# Altium PCB PCB1.PcbDoc
Units mil, origin at the board's own origin, x right, y up, seen from the top; angles counter-clockwise.
Board outline 1157.48 x 1771.65 mil, 2 copper layers (Top Layer, Bottom Layer); 46 components, 32 nets, 192 pads, 99 vias.
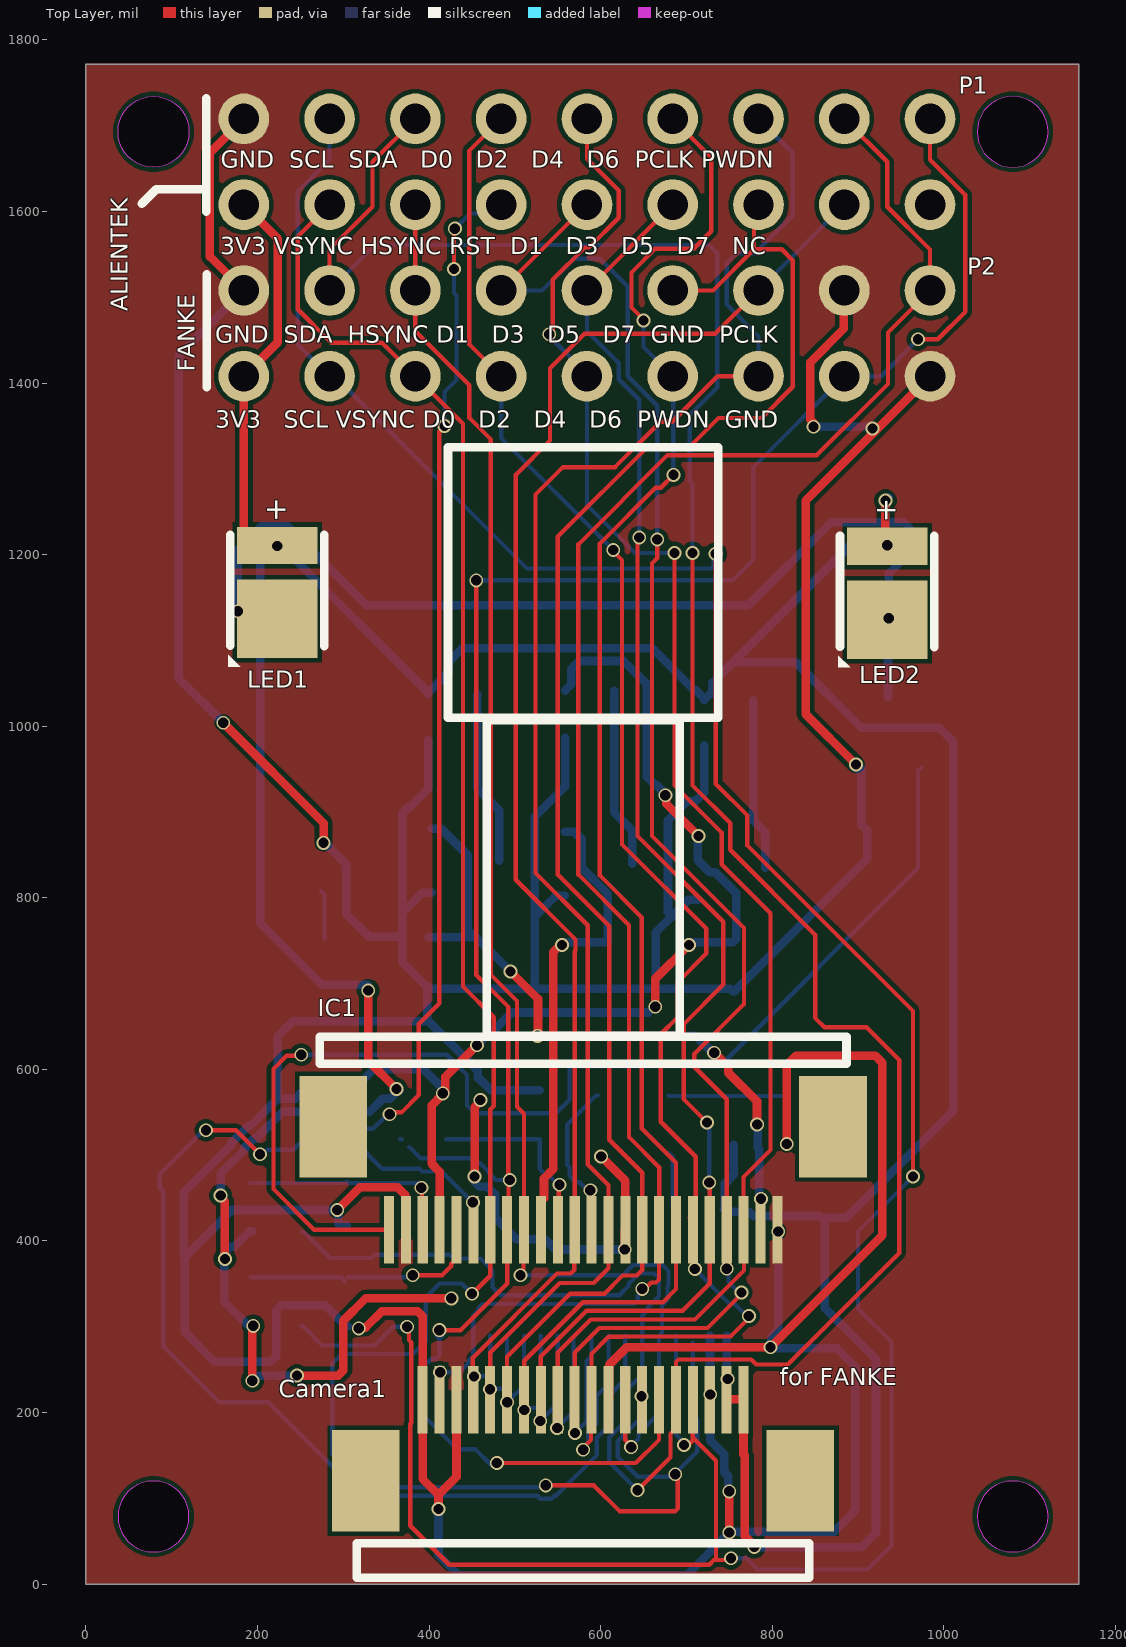
[diagram p0: Top Layer view]
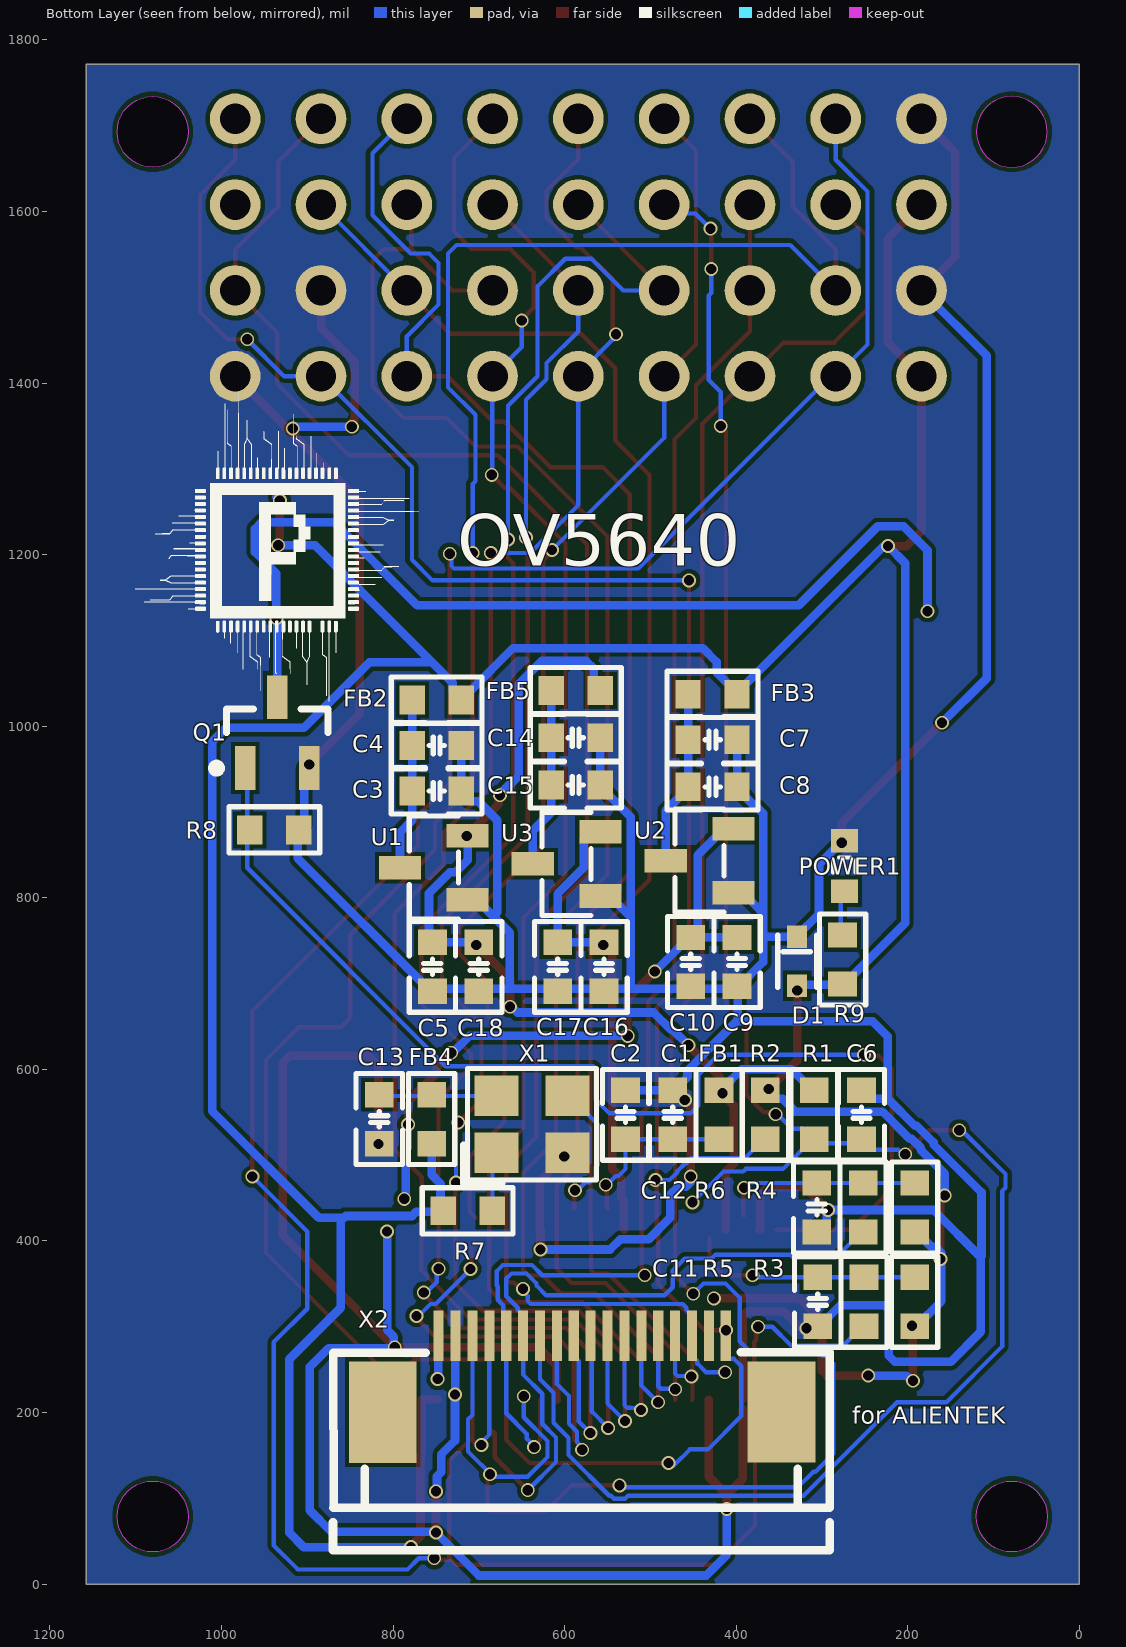
[diagram p1: Bottom Layer view, seen from below]
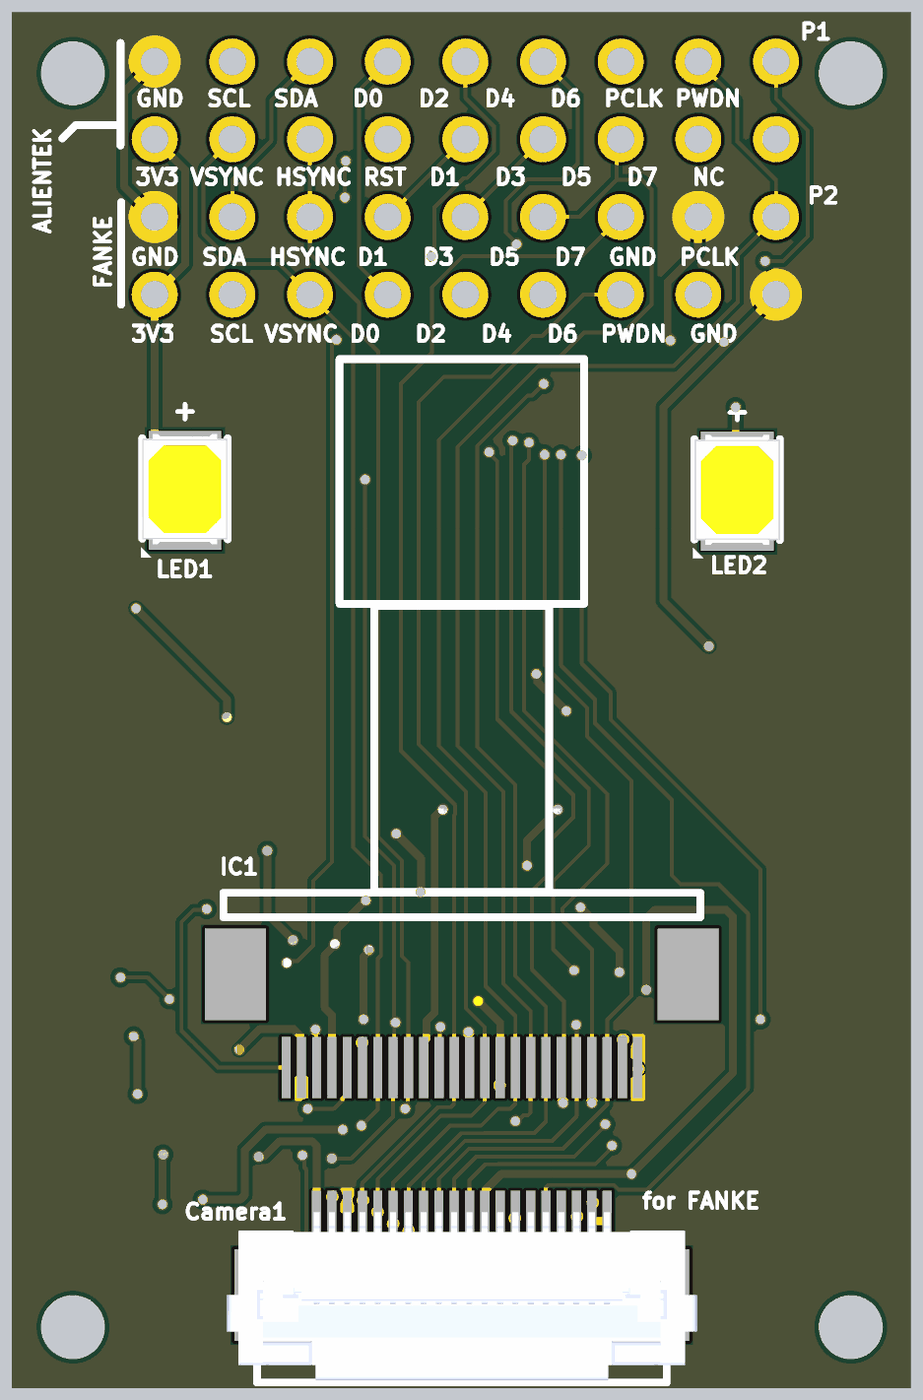
[diagram p2: 3D render of the assembled board from above, using the file's embedded part models]
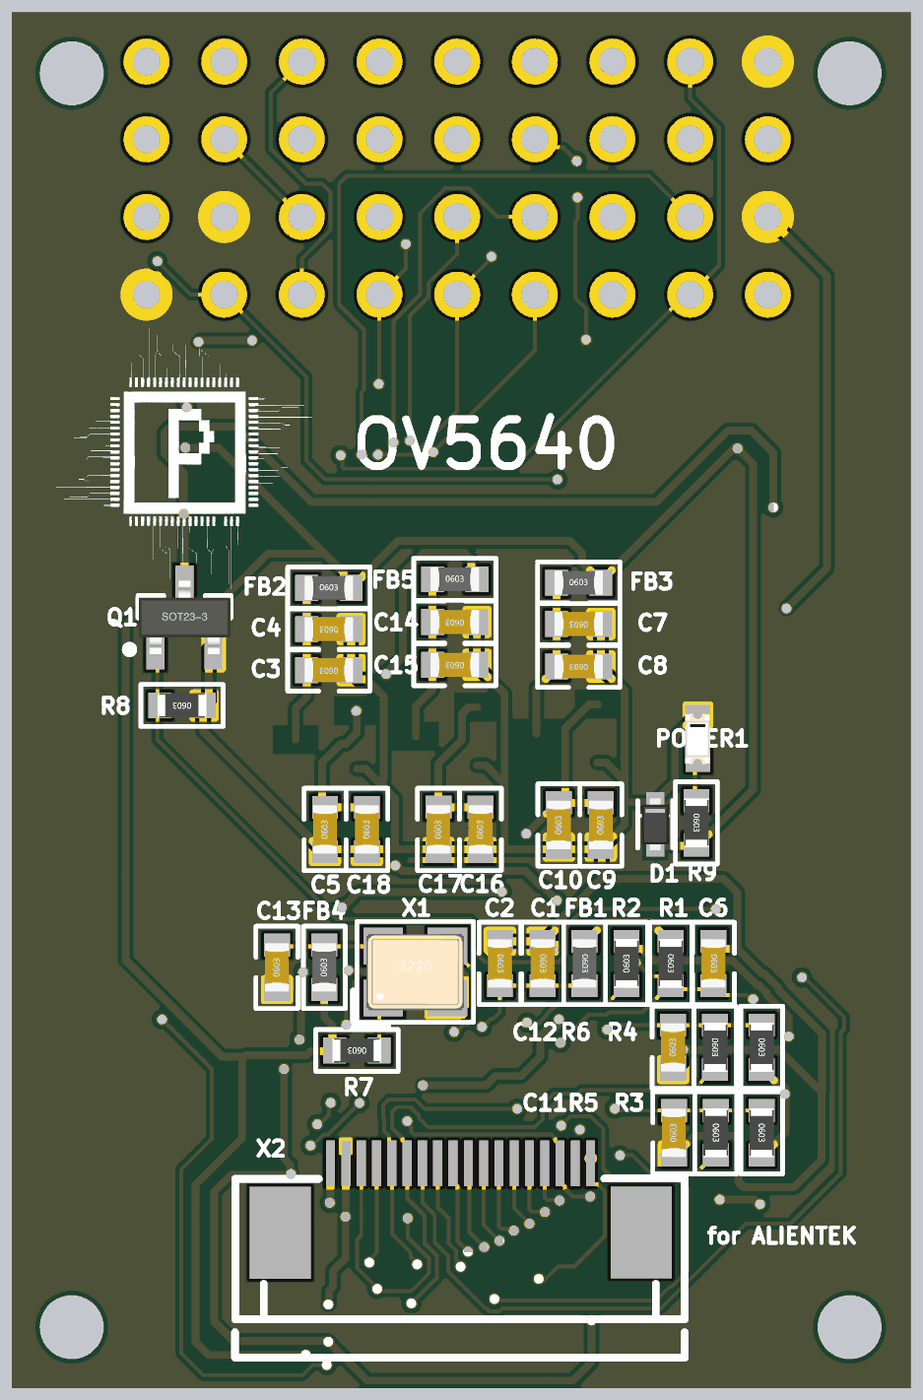
[diagram p3: 3D render of the assembled board from below, using the file's embedded part models]

## Layer stack, top to bottom
Top Solder: solder mask 0.4, Solder Resist, Dk 3.5
Top Layer: signal copper 1.4
Dielectric 1: dielectric 12.6, FR-4, Dk 4.8
Bottom Layer: signal copper 1.4
Bottom Solder: solder mask 0.4, Solder Resist, Dk 3.5

## Board outline
0,0 0,1771.65 1157.48,1771.65 1157.48,0
cut-out: 1038.94,1692.91 ccw(c1080.28,1692.91) 1080.28,1651.57 ccw(c1080.28,1692.91) 1121.61,1692.91 ccw(c1080.28,1692.91) 1080.28,1734.25 ccw(c1080.28,1692.91)
cut-out: 1038.94,78.74 ccw(c1080.28,78.74) 1080.28,37.4 ccw(c1080.28,78.74) 1121.61,78.74 ccw(c1080.28,78.74) 1080.28,120.08 ccw(c1080.28,78.74)
cut-out: 37.4,78.74 ccw(c78.74,78.74) 78.74,37.4 ccw(c78.74,78.74) 120.08,78.74 ccw(c78.74,78.74) 78.74,120.08 ccw(c78.74,78.74)
cut-out: 78.74,1651.57 cw(c78.74,1692.91) 37.4,1692.91 cw(c78.74,1692.91) 78.74,1734.25 cw(c78.74,1692.91) 120.08,1692.91 cw(c78.74,1692.91)

## Design rules (kind name [scope] priority, off if disabled: settings)
Clearance [All] p1: gap=5 ignorepadtopadclearanceinfootprint=FALSE
PlaneClearance [All] p1: clearance=7
PlaneConnect [All] p1: planeconnectstyle=Direct reliefexpansion=20 reliefentries=4 reliefconductorwidth=10 reliefairgap=10
PolygonConnect [All] p1: connectstyle=Direct reliefconductorwidth=10 reliefentries=4 polygonreliefangle="90 Angle" airgapwidth=10
RoutingVias [All] p1: holewidth=12 width=16.14 viastyle="Through Hole" minholewidth=12 minwidth=16.14 maxholewidth=12 maxwidth=16.14
SolderMaskExpansion [All] p1: expansion=4 istentingtop=FALSE
Width power [InNetClass('power')] p1: maxlimit=12 minlimit=10 preferedwidth=10 minimp=50.000000 maximp=50.000000 favimp=50.000000
Width [All] p2: maxlimit=12 minlimit=5 preferedwidth=5 minimp=50.000000 maximp=50.000000 favimp=50.000000
28 further rules are at their usual default settings.

## Classes and differential pairs
net class cam_data: DCMI_D0 DCMI_D1 DCMI_D2 DCMI_D3 DCMI_D4 DCMI_D5 DCMI_D6 DCMI_D7 DCMI_HSYNC DCMI_PIXCLK DCMI_VSYNC
net class power: 1.5V 2.8V 3.3V AF-2.8V GND

## Components (designator, comment, footprint, x,y, rotation, side; value= is the part's Value field where it differs from the comment)
C1 "0.1UF" C0603_L 474,547 r270 bottom
C2 "10UF" C0603_L 529,547 r270 bottom
C3 "10UF" C0603_L 749.15,924.49 r0 bottom
C4 "0.1UF" C0603_L 749.15,977.49 r0 bottom
C5 "10UF" C0603_L 754.15,719.49 r90 bottom
C6 "1UF" C0603_L 254,547 r270 bottom
C7 "10UF" C0603_L 427.54,984.14 r0 bottom
C8 "0.1UF" C0603_L 427.54,929.32 r0 bottom
C9 "10UF" C0603_L 399.04,725.24 r90 bottom
C10 "0.1UF" C0603_L 453.04,725.24 r90 bottom
C11 "100pF" C0603_L 305,329 r90 bottom
C12 "100pF" C0603_L 306,439 r90 bottom
C13 "1UF" C0603_L 816.05,541.95 r90 bottom
C14 "10UF" C0603_L 587.06,986.55 r0 bottom
C15 "0.1UF" C0603_L 587.06,931.55 r0 bottom
C16 "10UF" C0603_L 554.06,719.55 r90 bottom
C17 "0.1UF" C0603_L 608.06,719.55 r90 bottom
C18 "0.1UF" C0603_L 700.15,719.49 r90 bottom
Camera1 "FPC 20P-0.5mm翻盖下接" FPC20P-0.5MM 579.5,167.6 r0 top locked
D1 "ESD5Z3V3/丝印ZE" SOD523 329,726 r270 bottom
FB1 "SCBG160808U501T" FB0603 420,547 r270 bottom
FB2 "SCBG160808U501T" FB0603 749.15,1030.49 r180 bottom
FB3 "SCBG160808U501T" FB0603 427.54,1037.14 r180 bottom
FB4 "SCBG160808U501T" FB0603 755.05,541.95 r90 bottom
FB5 "SCBG160808U501T" FB0603 587.06,1041.55 r180 bottom
IC1 "OV5640" OV2640 579.5,475.04 r0 top locked
LED1 "2835" "LED 2835-2P" 223,1168 r90 top
LED2 "2835" "LED 2835-2P" 934,1167 r90 top
P1 "Header 9X2" HDR2X9#1 184,1608 r0 top
P2 "Header 9X2" HDR2X9#2 184,1508 r0 top
POWER1 "LED" D0603 274,837 r90 bottom
Q1 "SI2302" SOT23-3N 935,992.44 r180 bottom
R1 "10k" R0603_L 309,547 r270 bottom
R2 "10k" R0603_L 366,547 r90 bottom
R3 "2.7k" R0603_L 192,329 r270 bottom
R4 "2.7k" R0603_L 192,439 r270 bottom
R5 "39" R0603_L 251,329 r270 bottom
R6 "39" R0603_L 252,439 r270 bottom
R7 "10k" R0603_L 713,435 r0 bottom
R8 "10K" R0603_L 938.4,879.1 r0 bottom
R9 "10k" R0603_L 276,728 r270 bottom
U1 "LN6206P282MR-G" SOT-23-3_L2.9-W1.3-P1.90-LS2.4-BR 17705.13,17432.09 r180 bottom
U2 "LN6206P282MR-G" SOT-23-3_L2.9-W1.3-P1.90-LS2.4-BR 17395.25,17440.14 r180 bottom
U3 "LN6206P152MR-G" SOT-23-3_L2.9-W1.3-P1.90-LS2.4-BR 17550.32,17436.54 r180 bottom
X1 "24M" OSC-3225-4P 638,536 r180 bottom
X2 "AFC07-S18ECA-00" FPC-SMD_AFC07-S18ECA-00 579.5,244.94 r180 bottom locked

## Footprints (in the part's own frame and the unit in brackets; to place one, negate y for a bottom-side part, rotate by r counter-clockwise, add the part's x,y. Pads: shape width x height; smd on the part's side, far side on the other; paste and mask are expansions set on the pad)
C0603_L [mm]
  rect 0.75x0.85 smd: 1(-0.725,0) 2(0.725,0)
  silkscreen extent -1.35,-0.69 1.35,0.69, body extent -0.8,-0.4 0.8,0.4, height 0.8
D0603 [mm]
  rect 0.7x0.8 smd: 1(-0.75,0) 2(0.75,0)
  silkscreen extent -0.19,-0.33 0.25,0.33, body extent -0.85,-0.39 0.8,0.41, height 0.52
FB0603 [mm]
  rect 0.75x0.85 smd: 1(-0.725,0) 2(0.725,0)
  silkscreen extent -1.35,-0.69 1.35,0.69, body extent -0.8,-0.4 0.8,0.4, height 0.8
FPC20P-0.5MM [mm]
  rect 2x3 smd: 0(-6.436,-1.202) 0(6.436,-1.202)
  rect 0.3x2 smd: 1(4.75,1.202) 2(4.25,1.202) 3(3.75,1.202) 4(3.25,1.202) 5(2.75,1.202) 6(2.25,1.202) 7(1.75,1.202) 8(1.25,1.202) 9(0.75,1.202) 10(0.25,1.202) 11(-0.25,1.202) 12(-0.75,1.202) 13(-1.25,1.202) 14(-1.75,1.202) 15(-2.25,1.202) 16(-2.75,1.202) 17(-3.25,1.202) 18(-3.75,1.202) 19(-4.25,1.202) 20(-4.75,1.202)
  silkscreen extent -6.7,-4.07 6.7,-3.05, body extent -7.7,-4 7.7,1.5, height 2.1
FPC-SMD_AFC07-S18ECA-00 [mm]
  rect 0.3x1.5 smd: 1(-4.26,1.133) 2(-3.75,1.133) 3(-3.25,1.133) 4(-2.75,1.133) 5(-2.25,1.133) 6(-1.75,1.133) 7(-1.25,1.133) 8(-0.75,1.133) 9(-0.25,1.133) 10(0.25,1.133) 11(0.75,1.133) 12(1.25,1.133) 13(1.75,1.133) 14(2.25,1.133) 15(2.75,1.133) 16(3.25,1.133) 17(3.75,1.133) 18(4.25,1.133)
  rect 2x3 smd: 19(5.901,-1.126) 20(-5.901,-1.133)
  silkscreen extent -7.38,-5.22 7.33,0.64
HDR2X9#1 [mm]
  round 1.5 hole 0.9: 1(0,0) 2(0,2.54) 3(2.54,0) 4(2.54,2.54) 5(5.08,0) 6(5.08,2.54) 7(7.62,0) 8(7.62,2.54) 9(10.16,0) 10(10.16,2.54) 11(12.7,0) 12(12.7,2.54) 13(15.24,0) 14(15.24,2.54) 15(17.78,0) 16(17.78,2.54) 17(20.32,0) 18(20.32,2.54)
HDR2X9#2 [mm]
  round 1.5 hole 0.9: 1(0,0) 2(0,-2.54) 3(2.54,0) 4(2.54,-2.54) 5(5.08,0) 6(5.08,-2.54) 7(7.62,0) 8(7.62,-2.54) 9(10.16,0) 10(10.16,-2.54) 11(12.7,0) 12(12.7,-2.54) 13(15.24,0) 14(15.24,-2.54) 15(17.78,0) 16(17.78,-2.54) 17(20.32,0) 18(20.32,-2.54)
"LED 2835-2P" [mm]
  rect 1.1x2.38 smd mask+0.051: 1(1.088,0)
  rect 2.33x2.38 smd mask+0.051: 2(-1.088,0)
  silkscreen extent -2.5,-1.4 1.4,1.45, body extent -2.06,-1.4 1.54,1.4, height 0.71
OSC-3225-4P [mm]
  rect 1.3x1.2 smd: 1(-1.05,-0.85) 2(1.05,-0.85) 3(1.05,0.85) 4(-1.05,0.85)
  silkscreen extent -2.03,-1.75 1.91,1.65, body extent -1.6,-1.25 1.6,1.25, height 0.7
OV2640 [mm]
  rect 2x3 smd: 0(-7.4,1.476) 0(7.4,1.476)
  rect 0.3x2 smd: 1(-5.746,-1.574) 2(-5.248,-1.576) 3(-4.748,-1.576) 4(-4.248,-1.576) 5(-3.748,-1.576) 6(-3.248,-1.576) 7(-2.748,-1.576) 8(-2.248,-1.576) 9(-1.748,-1.576) 10(-1.248,-1.576) 11(-0.748,-1.576) 12(-0.248,-1.576) 13(0.252,-1.576) 14(0.752,-1.576) 15(1.252,-1.576) 16(1.752,-1.576) 17(2.252,-1.576) 18(2.752,-1.576) 19(3.252,-1.576) 20(3.752,-1.576) 21(4.252,-1.576) 22(4.752,-1.576) 23(5.252,-1.576) 24(5.752,-1.576)
  silkscreen extent -7.8,3.34 7.8,4.13
R0603_L [mm]
  rect 0.75x0.85 smd: 1(-0.725,0) 2(0.725,0)
  silkscreen extent -1.35,-0.69 1.35,0.69, body extent -0.8,-0.4 0.8,0.4, height 0.4
SOD523 [mil]
  rect 26x23.62 smd paste+0 mask+0: 1(28.5,0) 2(-28.5,0)
  silkscreen extent -31,-23 31,23, body extent -34,-17 34,17, height 28
SOT23-3N [mm]
  rect 0.6x1.3 smd: 1(-0.95,-1.05) 2(0.95,-1.05) 3(0,1.05)
  silkscreen extent -1.93,-1.17 1.5,0.7, body extent -1.5,-1.2 1.5,1.2, height 1.05
SOT-23-3_L2.9-W1.3-P1.90-LS2.4-BR [mm]
  rect 1.25x0.7 smd paste+0 mask+0.051: 1(431.596,-422.514) 2(431.596,-420.614) 3(429.597,-421.564)
  silkscreen extent 429.87,-423.09 431.32,-420.04

## Part data
C1 C2 C3 C4 C5 C6 C7 C8 C9 C10 C11 C12 C13 C14 C15 C16 C17 C18: library part C, "贴片电容/MLCC电容"
Camera1: library part FK_Camera
D1: library part TVS
FB1 FB2 FB3 FB4 FB5: library part FB, "贴片磁珠"
LED1 LED2: library part LED-2835, "0.2W 功率LED"
P1 P2: "Header, 9-Pin, Dual row"
Q1: "N沟道 20V/3A"
R1 R2 R3 R4 R5 R6 R7 R8 R9: library part R, "贴片电阻"
U3: library part LN6206P282MR-G
X1: library part XTAL-ACT-4P, "4脚有源晶振(振荡器)"

## Via types
v1: diameter 16.14, hole 12, Top Layer to Bottom Layer, tented both sides, 97 vias
v2: diameter 16.14, hole 12.01, Top Layer to Bottom Layer, tented both sides, 2 vias

## Nets (pads, with @x,y where several pads share a name; then routed paths per layer and width w, separated by ;. In a path a pad name is that pad's centre, name@x,y a point inside that pad or via, vN(x,y) a via of type N, cw(c..) or ccw(c..) an arc to the next point about the centre after c; other vN are vias at no path point)
1.5V: C16.2 C17.2 IC1.10 U3.2 | length 552.2
  Top Layer w10: IC1.10 531.28,413.91 531.28,447.37 533.94,450.03 533.94,472.86 544.5,483.43 544.5,736.5 553,745 v1(555,745)
  Bottom Layer w10: C16.2@555,748.09 C17.2 608.06,804.94 577.94,835.06 577.94,868.17 569.16,876.95 U3.2
2.8V: C5.2 C18.2 FB1.1 FB5.2 IC1.4 R1.1 U1.2 | length 1223.8
  Top Layer w10: IC1.4 412.26,480.74 403,490 403,558 416,571 v1(416,572) ; v1@419,572 419,591.25 v1(455.75,628) ; v1(663.57,673) 663.57,705.57 v1(703,745) ; v1(675.42,919.56) 676.59,918.39 676.59,909.41 v1(714,872)
  Bottom Layer w10: R1.1 310.97,575.54 335.73,600.31 393.27,600.31 415.57,578 FB1.1@417,578 ; v1(455.75,628) 474.47,646.72 476.72,646.72 496.24,666.24 655.15,666.24 661.91,673 v1(663.57,673) ; FB5.2 565.89,1048.91 565.89,1066.89 575,1076 626.79,1076 653.67,1049.12 653.67,941.33 663.01,931.99 664.92,931.99 664.92,931.73 675.42,921.22 v1(675.42,919.56) ; v1(703,745) 703,745.18 C18.2 C5.2 758.06,751.95 758.06,805.3 733.7,829.66 727.2,829.66 713.15,843.71 U1.2 713.51,872.49 v1(714,872)
3.3V: Camera1.1 Camera1.2 D1.1 FB2.2 FB3.2 FB4.1 LED1.1 LED2.1 P1.1 P2.2 R2.2 R3.2 R4.2 R7.2 R9.2 X2.1 | length 4927.7
  Top Layer w10: v1(162,379) 162,446.34 ; P1.1 223.53,1568.47 223.53,1447.53 P2.2 184,1227.47 201.47,1210 v1(223,1210) ; v1(194,237) 194,300 v1(195,301) ; v1(246,243) 294.14,243 300,248.86 300,307 326,333 v1(426,333) ; v1(329,692) 329,610 v1(362,577) ; Camera1.2@747.71,215.29 766.15,215.29 Camera1.1 766.49,151.51 768,150 768,55.77 779,44.77 v1(779,43.11) ; LED2.1@932,1220 v1(932,1263) ; LED2.1 v1(934,1211)
  Bottom Layer w10: v1(157.01,452.99) 157.01,478.19 184.93,506.11 184.93,508.49 195.51,519.07 197.89,519.07 229.6,550.78 330.98,550.78 345.98,565.78 354.27,565.78 R2.2@364.03,575.54 ; R3.2 190.03,300.46 161,329.49 161,386 168.07,393.07 172.65,393.07 190.57,411 R4.2@194,411 ; v1(194,237) 195.66,237 201.66,243 v1(246,243) ; D1.1 328.02,698.48 275.48,698.48 275.24,698.24 203,770.49 203,1190 v1(223,1210) 228.11,1210 399,1039.11 FB3.2 ; v1(362,577) 363.46,575.54 R2.2@364.03,575.54 ; R2.2 R2.2@364.03,575.54 ; FB3.2@401,1041.11 422.91,1063.02 422.91,1074.91 439,1091 660.09,1091 708.87,1042.22 710.84,1042.22 FB2.2@720.6,1032.46 ; v1@425.74,333 v1(426,333) ; FB2.2 730.37,1040.25 730.37,1050.37 754.5,1074.5 ; X2.1 747.22,239.78 v1(748,239) ; FB4.1@755,512 755,477.04 744.7,466.73 744.7,438.15 743.77,437.23 747,434 772.88,434 777.88,429 799.44,429 799.51,429.07 855.07,429.07 857.14,427 886.68,427 1011,551.32 1011,982 995,998 904,998 827.5,1074.5 754.5,1074.5 ; v1(779,43.11) 779.11,43 904,43 921,60 921,262 861,322 861,423.14 ; v1(932,1263) v1@936,1267 ; v1(934,1211) 891,1211 754.5,1074.5
AF-2.8V: C9.2 C10.2 IC1.23 U2.2 | length 761.6
  Top Layer w10: v1(495,714) 527,682 527,639.57 v1(526.43,639) ; v1(732.3,619.28) 748.86,602.71 748.86,596.14 782.29,562.71 782.29,538.59 782.43,538.45 v1(782.43,535.75)
  Bottom Layer w10: C9.2 C10.2 ; U2.2 414.09,880.54 445,849.64 445,761.83 C10.2 ; v1(495,714) 494.8,714 455.01,753.79 C10.2 ; v1(526.43,639) 710.91,639 730.63,619.28 v1(732.3,619.28) ; v1(782.43,535.75) 783.14,535.04 783.14,508.43 785,506.57 785,450.98 v1(786.98,449)
CAM_PWDN: Camera1.6 IC1.8 P1.18 P2.16 R2.1 X2.18 | length 2545.6
  Top Layer w5: v1(412,296) 437,296 491,350 IC1.8 492.5,414.5 492.5,469.5 v2(494,471) 492.43,472.57 492.43,672.57 455,710 v1(455,1170) ; v1(479,141) 641,141 668.07,168.07 Camera1.6 ; v1(970,1451) 993,1451 1025,1483 1025,1619.36 984,1660.36 P1.18
  Bottom Layer w5: R2.1 R2.1@367.97,518.46 ; R2.1@377,509.43 390.23,496.19 452.48,496.19 458.11,490.57 459.45,490.57 468.57,481.45 468.57,480.11 477.68,471 v2@491,471 ; v1(412,296) 412,265.75 408.77,262.52 402.56,262.52 394.05,254 394.05,195.95 433,157 454,157 472.43,138.57 472.73,138.87 476.87,138.87 v1(479,141) ; v1(455,1170) 754,1170 778,1194 778,1302 P2.16 927,1408 v1(970,1451)
  Bottom Layer w10: X2.18 X2.18@413.08,290.45
CAM_RESET: C6.2 IC1.6 P1.7 R1.2 X2.7 | length 2590.8
  Top Layer w5: v1(140,529) 175,529 v1(203,501) ; v1(354,547.71) 356.13,549.84 367.84,549.84 388,570 388,653 412,677 412,1344 v1(418,1350) ; v1(429,1533) 429,1579 v1(430,1580) ; v1(450.93,444.93) v1(451,444.93)
  Bottom Layer w5: v1(140,529) 137,529 86,478 86,462 90,458 90,277 155,212 212.6,212 321.6,103 525.98,103 529.55,99.43 542.45,99.43 546.02,103 548.02,103 595.57,150.55 595.57,170.57 613,188 613,223 628.72,238.72 X2.7 ; v1(203,501) 206.01,501 211.21,506.19 241.74,506.19 C6.2 258.46,514 R1.2@311,514 ; v1(354,547.71) 351.71,547.71 334.72,530.72 321.26,530.72 R1.2 310.97,518.46 345.43,484 388.7,484 391.7,481 414.86,481 v1(450.93,444.93) ; v1(418,1350) 418,1389.64 432,1403.64 432,1502 429,1505 v1(429,1533) ; v1(430,1580) 447.66,1597.66 473.66,1597.66 P1.7
CAM_STROBE: IC1.1 Q1.1 R8.2 | length 1360.4
  Top Layer w5: v1(251,617) 250,616 234,616 218.57,600.57 218.57,460.43 265.94,413.06 IC1.1
  Bottom Layer w5: v1(251,617) 420.65,617 444.23,593.41 444.23,557.78 453.35,548.66 547.68,548.66 563.57,564.55 563.57,600.78 566.5,603.7 738.75,603.7 970,834.96 970,879.1 970,948 Q1.1@974,952
DCMI_D0: Camera1.10 IC1.19 P1.8 P2.8 X2.8 | length 2040.1
  Top Layer w5: P2.8 446.97,1445.03 446.97,1670.97 P1.8 ; v1(579.57,156.57) 579.57,158.98 588.66,168.07 588.66,214.28 Camera1.10 589.33,268.33 609.43,288.43 625.09,288.43 625.16,288.5 751.49,288.5 774.14,311.15 775.49,312.51 v1(772.78,312.51) ; v1(614.68,1205.3) 614.68,1203.92 625,1193.6 625,862 723,764 723,735 690,702 690,661 670,641 670,539 710.95,498.05 710.95,433.95 IC1.19@704,427 ; IC1.19@705,399 708.69,395.31 708.69,368.52 v1(709.84,367.37)
  Bottom Layer w5: P2.8 484,1335.98 v1(614.68,1205.3) ; v1(579.57,156.57) 579.57,159.59 585.57,165.59 585.57,177.43 595,186.86 595,219.14 609.03,233.17 X2.8 ; v1(709.84,367.37) 711,366.21 711,365.86 750.29,326.57 756.23,326.57 770.29,312.51 v1(772.78,312.51)
DCMI_D1: Camera1.11 IC1.21 P1.9 P2.7 X2.9 | length 2040.5
  Top Layer w5: P2.7 P1.9 ; v1(570,176) 570,214.58 Camera1.11 569.64,269.64 598.43,298.43 620.95,298.43 621.02,298.5 724.5,298.5 764.17,338.17 v1(764.17,339.97) ; v1(666,1217.57) 666,1196 659.85,1189.85 659.85,872.01 767,764.86 767,676 709,618 709,603 746.91,565.09 IC1.21 v1(746.91,367.58)
  Bottom Layer w5: P2.7 531.64,1508 568.66,1545.03 599.34,1545.03 631.6,1512.76 631.6,1408.03 666,1373.64 v1(666,1217.57) ; v1(570,176) 583.54,189.54 583.54,260.12 589.34,265.92 X2.9 ; v1(746.91,367.58) 748.99,365.5 748.99,352.01 751.83,349.17 751.95,349.17 761.15,339.97 v1(764.17,339.97)
DCMI_D2: Camera1.12 IC1.22 P1.10 P2.10 X2.10 | length 2002.5
  Top Layer w5: v1(540,1457) 541.07,1457 544,1459.93 544,1520.36 581.64,1558 586.36,1558 621.03,1592.66 621.03,1624.5 584,1661.53 P1.10 ; v1(549.25,182) 549.25,214.23 Camera1.12 549.96,269.85 588.54,308.43 616.8,308.43 616.87,308.5 709.85,308.5 767,365.65 767,412.59 IC1.22 766.59,474.59 798,506 798,782 741,839 741,876 686,931 v1(686,1202)
  Bottom Layer w5: v1(540,1457) 540,1454.5 584,1410.5 P2.10 584,1258 640,1202 v1(686,1202) ; v1(549.25,182) 568.24,200.99 568.24,288.13 X2.10
DCMI_D3: Camera1.13 IC1.20 P1.11 P2.9 X2.11 | length 1814.1
  Top Layer w5: v1(529.56,190) 529.56,214.23 Camera1.13 530.27,265.5 583.2,318.43 612.66,318.43 612.73,318.5 695.5,318.5 727.22,350.22 IC1.20 727.22,467.47 v1(726.67,468.02) ; P2.9 P1.11 ; v1(645,1220.01) 643,1218.01 643,872 743,772 743,699 697,653 697,565 v1(724,538)
  Bottom Layer w5: v1(529.56,190) 549.97,210.41 X2.11 ; P2.9 584,1460.36 621.03,1423.34 621.03,1404.47 645,1380.49 v1(645,1220.01) ; v1(724,538) 726.67,535.33 v1(726.67,468.02)
DCMI_D4: Camera1.14 IC1.18 P1.12 P2.12 X2.12 | length 1915.6
  Top Layer w5: v1(511,203) 510.59,203.41 Camera1.14 510.88,215.24 510.88,260.25 579.06,328.43 608.52,328.43 608.59,328.5 672.5,328.5 687.85,343.85 IC1.18 687.85,491.15 648,531 648,777 599.11,825.89 599.11,1213.11 664,1278 670,1278 v1(685,1293) ; v1(650,1473) 650,1474 636,1488 636,1529 663.5,1556.5 708.5,1556.5 729,1577 729,1663 P1.12
  Bottom Layer w5: v1(511,203) 513.13,205.13 522.67,205.13 523.11,205.57 527.36,205.57 530.28,208.5 X2.12 ; v1(650,1473) 650,1442 P2.12 684.5,1407.5 684.5,1293.5 v1(685,1293)
DCMI_D5: Camera1.15 IC1.16 P1.13 P2.11 X2.13 | length 1943.9
  Top Layer w5: Camera1.15 490.9,264.9 564.43,338.43 604.38,338.43 625.59,359.64 641.99,359.64 648.48,366.13 648.48,479.52 610,518 610,767 550,827 550,1221 655,1326 704,1326 737.33,1359.33 787.7,1359.33 824,1395.64 824,1543 811.07,1555.93 778.81,1555.93 ; P2.11 730.88,1508 778.81,1555.93 ; P1.13 778.81,1602.81 778.81,1555.93
  Bottom Layer w5: v1(491,212) 510.61,231.61 X2.13
DCMI_D6: Camera1.16 IC1.14 P1.14 P2.14 X2.14 | length 1944.6
  Top Layer w5: Camera1.16 471.22,227 471.22,269.85 552.37,351 591.96,351 609.11,368.15 IC1.14 609.11,464.89 585,489 585,768 524,829 524,1270 556,1302 616.86,1302 669.86,1355 683.36,1355 736.36,1408 P2.14
  Bottom Layer w5: v1(471,227) 471.57,227.57 487.99,227.57 490.91,230.5 X2.14 ; P2.14 784,1454.47 746.97,1491.5 746.97,1540.04 757.93,1551 779.36,1551 824,1595.64 824,1668 P1.14
DCMI_D7: Camera1.17 IC1.12 P1.15 P2.13 X2.15 | length 1794.6
  Top Layer w5: Camera1.17 451,215.47 Camera1.17@451,241.86 ; v1(452.24,241.86) Camera1.17@451,241.86 ; P2.13 733.43,1457.43 581.06,1457.43 541,1417.36 541,1333 501,1293 501,821.02 570.57,751.45 570.57,738.51 569.74,737.68 IC1.12 569.2,412.46 569.2,366.13 565.07,362 549.23,362 451,263.77 Camera1.17@451,241.86
  Bottom Layer w5: v1(452.24,241.86) 452.95,242.57 468.31,242.57 471.24,245.5 X2.15 ; P2.13 P1.15
DCMI_HSYNC: Camera1.8 IC1.9 P1.5 P2.5 X2.5 | length 1764.1
  Top Layer w5: P1.5 P2.5 384,1460.36 446.97,1397.39 446.97,1359.17 472,1334.14 472,710 502.43,679.57 502.43,556.4 510.69,548.13 IC1.9 510.06,412.37 510.06,366.5 506.57,363.01 v2(506.57,360) ; Camera1.8 628.63,214.88 628.63,167.95 635.57,161.02 v1(635.57,159.59)
  Bottom Layer w5: v2(506.57,360) 626,360 638,372 672,372 679,365 679,348 678,347 678,331.36 671.49,324.85 671.49,292.95 X2.5 668.09,199.09 644.06,175.06 644.06,169.51 635.57,161.02 v1(635.57,159.59)
DCMI_PIXCLK: Camera1.19 IC1.17 P1.16 P2.17 X2.16 | length 2039
  Top Layer w5: v1(648.43,344.07) 651.44,344.07 658.92,351.55 664.55,351.55 668.09,355.09 IC1.17@668.09,410.91 ; IC1.17 668.17,485.83 633,521 633,768 574,827 574,1212 678,1316 852,1316 935,1399 935,1459 P2.17 984,1555.64 934,1605.64 934,1658 P1.16
  Bottom Layer w5: v1(412.87,246.95) 435.31,246.95 445.27,256.91 445.27,259.65 451.55,265.92 451.55,313.17 457.83,319.45 457.83,322.18 462.22,326.57 639.57,326.57 643.11,330.11 643.11,335.74 648.43,341.06 v1(648.43,344.07)
DCMI_VSYNC: Camera1.7 IC1.7 P1.3 P2.6 X2.3 | length 2574.2
  Top Layer w5: P1.3 246.97,1570.97 246.97,1486.03 285.83,1447.17 344.83,1447.17 P2.6 439.43,1352.57 439.43,696.57 475.37,660.63 475.37,557.27 471.32,553.22 IC1.7 471.32,359.32 450.33,338.33 v1(450.12,338.33) ; v1(536,115) 592,115 622,85 687,85 690,88 690,125 v1(687,128) ; v1(647.67,219) 647.67,215.65 Camera1.7
  Bottom Layer w5: v1(450.12,338.33) 438,350.45 412.45,350.45 396,334 396,283 381.19,268.19 301.19,268.19 299,266 296,266 287,257 287,151.74 307.74,131 310,131 328,113 537,113 537,114 v1(536,115) ; v1(647.67,219) 647.67,194.39 620,166.72 620,148.14 643.14,125 683,125 712.61,154.61 712.61,192.04 707.45,197.2 X2.3@707.45,281.45
GND: C1.1 C2.1 C3.1 C4.1 C5.1 C6.1 C7.1 C8.1 C9.1 C10.1 C11.1 C12.1 C13.1 C14.1 C15.1 C16.1 C17.1 C18.1 Camera1.3 Camera1.9 Camera1.18 Camera1.20 D1.2 IC1.2 IC1.15 IC1.24 P1.2 P2.1 P2.15 P2.18 POWER1.2 Q1.2 R8.1 U1.1 U2.1 U3.1 X1.2 X2.2 | length 8085.1
  Top Layer w10: v1(160,1004) 277,887 v1(277,864) ; P2.1 144.47,1547.53 144.47,1668.47 P1.2 ; v1(293,436) 319.43,462.43 363.34,462.43 371.99,453.78 371.99,413.91 IC1.2 ; v1(318.07,298.07) 319,299 326,299 345,318 386.62,318 392.48,312.14 Camera1.20 ; Camera1.20@392.48,204.48 392.48,122.52 411,104 ; v1(411,87.43) 411,104 ; Camera1.18 431.92,214.87 431.92,125.08 411,104.15 411,104 ; v1(453,475) 453,555.76 459.8,562.56 v1(459.8,564.23) ; v1(600.57,498.43) 628.8,470.2 IC1.15 628.09,412.29 v1(628.09,390) ; Camera1.9 609.92,215.85 609.92,255.58 630.34,276 v1(798,276) ; Camera1.3 727.12,219.12 727.83,219.83 v1(727.83,221) ; v1(749.93,60) v1(749.93,108) ; v1@800,276 800,278 928.35,406.35 928.35,607.65 920,616 828,616 817,605 v1(817,513) ; IC1.24 805.96,412.04 v1(807,411) ; v1(848,1349) 848,1354 844.47,1357.53 844.47,1424.37 883.57,1463.47 883.57,1507.57 P2.15 ; v1(897.6,955.4) 839,1014 839,1263 P2.18
  Bottom Layer w10: 114,383 114,456.39 169.93,512.32 169.93,514.7 189.3,534.07 191.68,534.07 223.38,565.78 ; v1(160,1004) 108,1056 108,1432 P2.1 ; C6.1 244.24,565.78 223.38,565.78 ; POWER1.2@280,865 280,862.5 303.47,839.03 303.47,781.22 329,755.69 D1.2 365.5,754.5 367,753 ; C12.1@304,418 296.49,418 294.27,420.22 294.27,435.73 294,436 v1(293,436) 170,436 115,381 115,294 150,259 215,259 222,266 222,319.36 227.86,325.22 278.27,325.22 303.03,300.46 C11.1 ; C7.1 C8.1 399,927.35 377.19,905.54 375.73,905.54 368.66,898.47 368.66,789.26 ; U2.1 392.44,805.74 372.31,785.61 368.66,789.26 ; v1(411,87.43) 411,34 435,10 699.93,10 v1(749.93,60) 751.1,61.18 771.5,61.18 872.18,61.18 897,86 897,253 875,275 799,275 v1(798,276) ; v1(453,475) 453,468.86 458.86,463 468,463 477,454 477,427 502,402 535,402 547,390 v1(628.09,390) ; C1.1 472.03,575.54 456.73,590.84 456.73,598.59 399.32,656 ; C1.1@475.54,575.54 C2.1 ; U3.1 547.5,802.14 523,777.64 ; C14.1 C15.1 558.52,929.58 534.62,905.67 534.52,905.67 523,894.15 523,777.64 ; U1.1 702.32,797.69 683.16,778.53 ; C4.1 720.6,922.52 710.84,912.76 700.89,912.76 700,911.87 678.54,890.41 678.54,783.15 683.16,778.53 ; X2.2 727.48,289.2 727.48,221.35 v1(727.83,221) 727.83,167.17 744,151 744,130.32 748.75,125.57 748.75,109.18 v1(749.93,108) ; v1@797.34,277 799.18,278.84 799.18,288.5 807,296.32 v1(807,411) ; C13.1 816.46,513 v1(817,513) ; v1(848,1349) 915,1349 v1(917,1347) ; Q1.2 v1(897.6,955.4) ; Q1.2@903.73,951.1 903.73,885.23 R8.1 ; R8.1@911,879.1 911,845.83 756.12,690.95 C5.1 751.27,693.82 664,693.82 ; 223.38,565.78 223.38,638.38 241,656 399.32,656 ; 368.66,789.26 368.66,725.12 397.07,696.7 C9.1@398,696.7 ; C9.1@398,696.7 398,657.32 399.32,656 ; C9.1@398,696.7 C9.1 401.92,693.82 523,693.82 ; 523,693.82 664,693.82 ; 523,693.82 523,777.64 ; 664,693.82 664,759.37 683.16,778.53
IIC_SCLK: Camera1.4 P1.4 P2.4 R5.2 X2.4 | length 3507.6
  Top Layer w5: v1(374.4,299.93) 376.54,297.8 376.54,284.39 379.07,281.86 379.07,187.56 378,186.49 378,68 423.5,22.5 726.5,22.5 732,28 ; v1(697.04,162.01) 699.17,164.14 704.14,164.14 707.44,167.44 707.44,170.56 ; Camera1.4 707.44,170.56 ; v1(734,1201) 734,933 771,896 771,861 964,668 v1(964,475) ; v1(752,30) 750,28 732,28 ; 707.44,170.56 709,169 734.36,143.64 734.36,30.36 732,28
  Bottom Layer w5: R5.2 252.97,300.46 275.23,278.19 336.19,278.19 357.93,299.93 376.33,299.93 v1(374.4,299.93) ; P1.4 284,1660.36 246.97,1623.34 246.97,1445.03 P2.4 290,1408 514.13,1183.87 728.94,1183.87 731.87,1186.8 731.87,1198.87 v1(734,1201) ; X2.4 687.76,174.3 697.04,165.02 v1(697.04,162.01) ; v1(752,30) 770.09,30 783.09,17 911,17 939,45 939,282 900,321 900,411 v1(964,475)
IIC_SDA: Camera1.5 P1.6 P2.3 R6.2 X2.6 | length 3273.5
  Top Layer w5: P2.3 284,1555.64 334,1605.64 334,1658 P1.6 ; v1(643,109.43) 681.47,147.9 681.47,175.2 687.75,181.48 687.75,258.88 690.68,261.81 775.5,261.81 781.32,256 818,256 948,386 948,611 910,649 861,649 850,660 850,757 751,856 751,887 707.14,930.86 v1(707.14,1202)
  Bottom Layer w5: R6.2 253.97,410.46 284.43,380 333,380 337,384 424.01,384 428.51,379.5 460,379.5 473.93,365.57 473.93,346.07 483.43,336.57 621.57,336.57 632.86,347.86 632.86,350.52 644.34,362 662,362 668,356 668,335.5 654.68,322.18 654.68,319.45 648.39,313.17 648.39,244.25 626,221.86 626,186.86 610,170.86 610,142.43 v1(643,109.43) ; P2.3 337,1561 726.07,1561 736,1551.07 736,1395.01 704,1363.01 704,1285.58 707.14,1282.44 v1(707.14,1202)
NetC1_2: C1.2 C2.2 FB1.2 IC1.11 | length 199.7
  Top Layer w5: IC1.11@549.53,437.47 551.03,438.97 551.03,464.41 v1(552.01,465.38)
  Bottom Layer w5: FB1.2 C1.2 C2.2@525.54,518.46 ; C2.2 529,484 537.24,475.76 540.36,475.76 550.74,465.38 v1(552.01,465.38)
NetC3_2: C3.2 C4.2 FB2.1 U1.3 | length 201.3
  Bottom Layer w10: FB2.1 C4.2 C3.2 777.69,890.29 791.88,876.1 U1.3
NetC7_2: C7.2 C8.2 FB3.1 U2.3 | length 204.7
  Bottom Layer w10: FB3.1 C7.2 C8.2 456.09,927.35 482,901.43 U2.3
NetC11_2: C11.2 IC1.5 R3.1 R5.1 | length 272.6
  Top Layer w5: v1(381,360) 415.14,360 425.67,370.52 425.67,373.25 431,378.58 IC1.5@431,403
  Bottom Layer w5: R3.1 R5.1 297.46,357.54 C11.2@302,353 ; C11.2 378.54,357.54 v1(381,360)
NetC12_2: C12.2 IC1.3 R4.1 R6.1 | length 232.6
  Top Layer w5: IC1.3@391,430 391.79,430.79 391.79,461.21 v1(391,462)
  Bottom Layer w5: R4.1 R6.1 302.54,467.54 C12.2@304,469 ; C12.2 385.46,467.54 v1(391,462)
NetC13_2: C13.2 FB4.2 X1.4 | length 132.9
  Bottom Layer w5: X1.4 679.8,569 C13.2@812,569
NetC14_2: C14.2 C15.2 FB5.1 U3.3 | length 210.9
  Bottom Layer w10: FB5.1 C14.2 C15.2 615.61,899.68 637.06,878.22 U3.3
NetIC1_13: IC1.13 X1.3 | length 163.5
  Top Layer w5: v1(588,459) 588.72,458.28 588.72,438.28 IC1.13@589,438
  Bottom Layer w5: v1(588,459) 584.99,459 575.52,468.47 570.91,468.47 563.57,475.81 563.57,485.98 561,488.56 561,535.77 594.69,569.46 X1.3
NetLED1_2: LED1.2 LED2.2 Q1.3 | length 1155.2
  Bottom Layer w5: v1@935,1125 v1(936,1126)
  Bottom Layer w10: v1(177,1134) 177,1205 205,1233 235,1233 327,1141 772,1141 869,1238 953,1238 961,1230 961,1203 936,1178 v1(936,1126) ; Q1.3 v1@935,1125
NetPOWER1_1: POWER1.1 R9.1 | length 57.1
  Bottom Layer w5: POWER1.1 278,803.47 R9.1@278,752
NetR7_1: R7.1 X1.1 | length 63.5
  Bottom Layer w5: X1.1 684,497.87 R7.1@684,441
pads on no net: Camera1.0 IC1.0 P1.17 X2.17 X2.19 X2.20

## Polygon pours and split planes (outlines as drawn)
GND on Top Layer "GND_L01_P000" (solid, remove dead copper, pour order 0): 1158,1772 0,1772 0,0 1158,0
GND on Bottom Layer "GND_L02_P001" (solid, remove dead copper, pour order 1): 1158,1772 0,1772 0,0 1158,0

## Silkscreen, mask and mechanical layers (free items; w line width, h text height)
Top Overlay:
  lines w10: 65,1609 82,1626 137,1626 ; 140,1600 140,1732 ; 141,1395 141,1527 ; 422.02,1010.04 736.98,1010.04 736.98,1325 422.02,1325 422.02,1010.04 ; 467,639 692,639 692,1007 467,1007 467,639
  text "GND  SCL  SDA   D0   D2   D4   D6  PCLK PWDN" at 157,1651 h20
  text "3V3 VSYNC HSYNC RST  D1   D3   D5   D7   NC" at 156.55,1549.96 h20
  text "ALIENTEK" at 49,1484 h20 r90
  text "GND  SDA  HSYNC D1   D3   D5   D7  GND  PCLK" at 150.55,1446.96 h20
  text "FANKE" at 127,1413 h20 r90
  text "3V3   SCL VSYNC D0   D2   D4   D6  PWDN  GND" at 151,1348 h20
  text "for FANKE" at 809,232 h20
Bottom Overlay:
  drawing of 85 lines, arcs and shapes, not listed
  text "OV5640" at 725,1187 h60
  text "for ALIENTEK" at 265,187 h20
Mechanical 1:
  circle w10: c1080.28,1692.91 r41.34
  circle w10: c78.74,1692.91 r41.34
  circle w10: c1080.28,78.74 r41.34
  circle w10: c78.74,78.74 r41.34
  lines w10: 0,0 1157.48,0 1157.48,1771.65 0,1771.65 0,0

## Text inside footprints (layer, text, board x,y; h text height)
LED1: Top Overlay "+" at 233,1238 h25 r90
LED2: Top Overlay "+" at 944,1237 h25 r90